# Altium PCB DC_Input.PcbDoc
Units mm, origin at the board's own origin, x right, y up, seen from the top; angles counter-clockwise.
Board outline 181.99 x 100.46 mm, 2 copper layers (Top Layer, Bottom Layer); 86 components, 56 nets, 287 pads, 8 vias.
Unrouted connection lines stored in the file: 6.
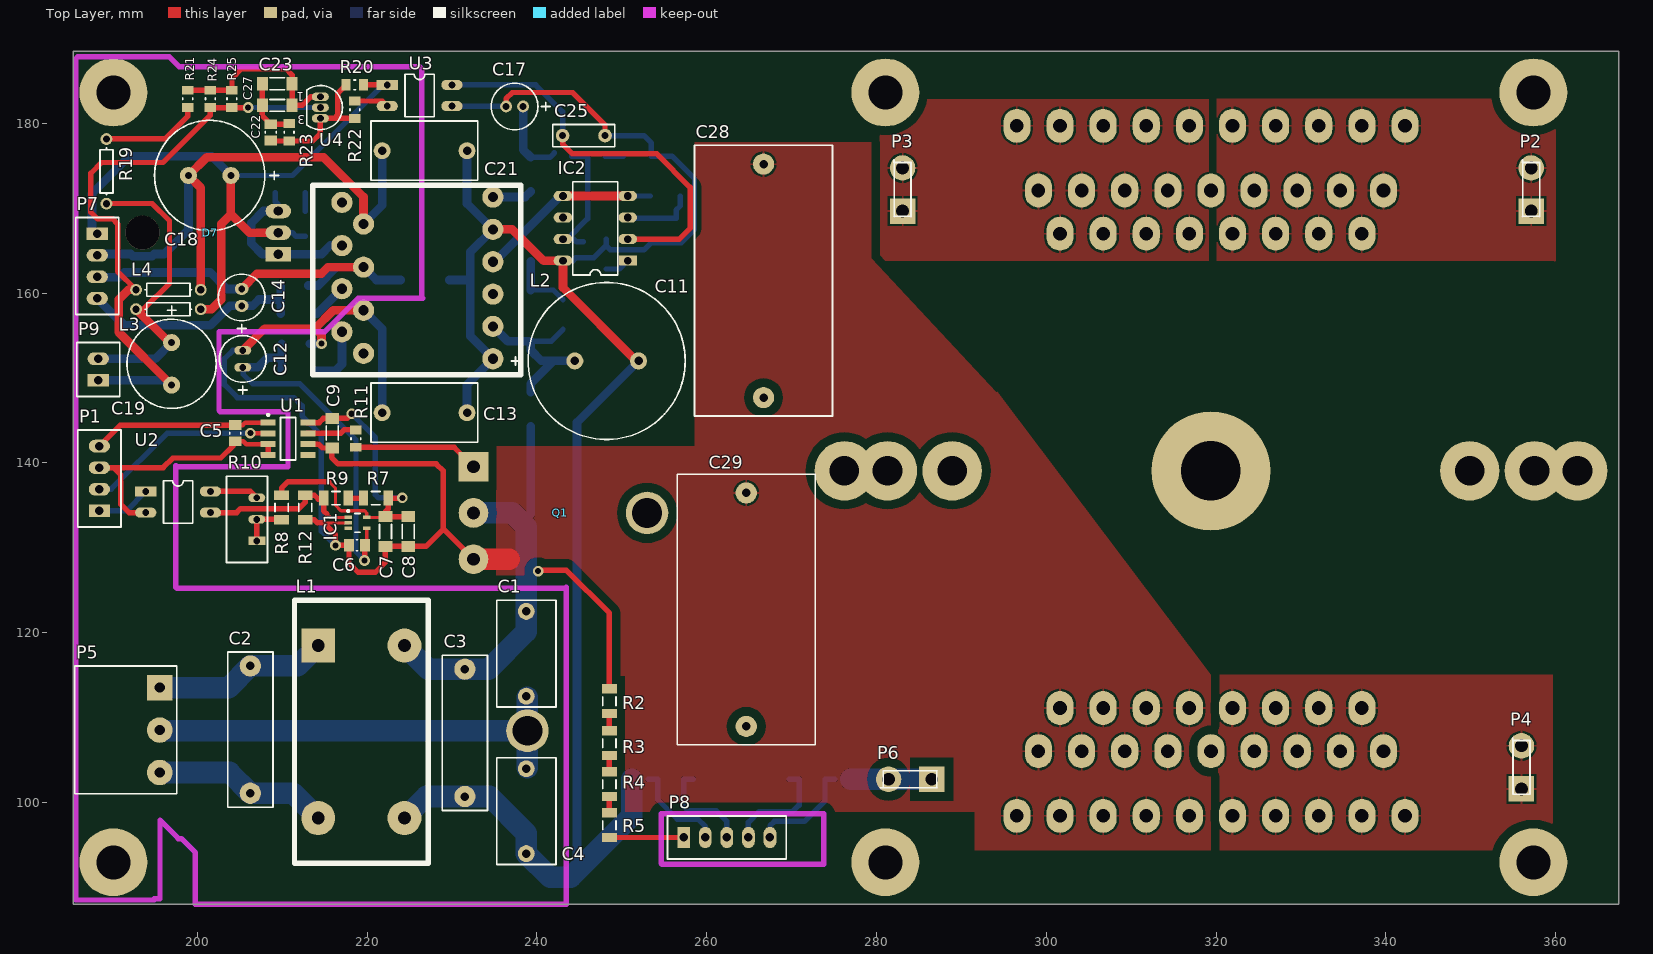
[diagram p0: Top Layer view]
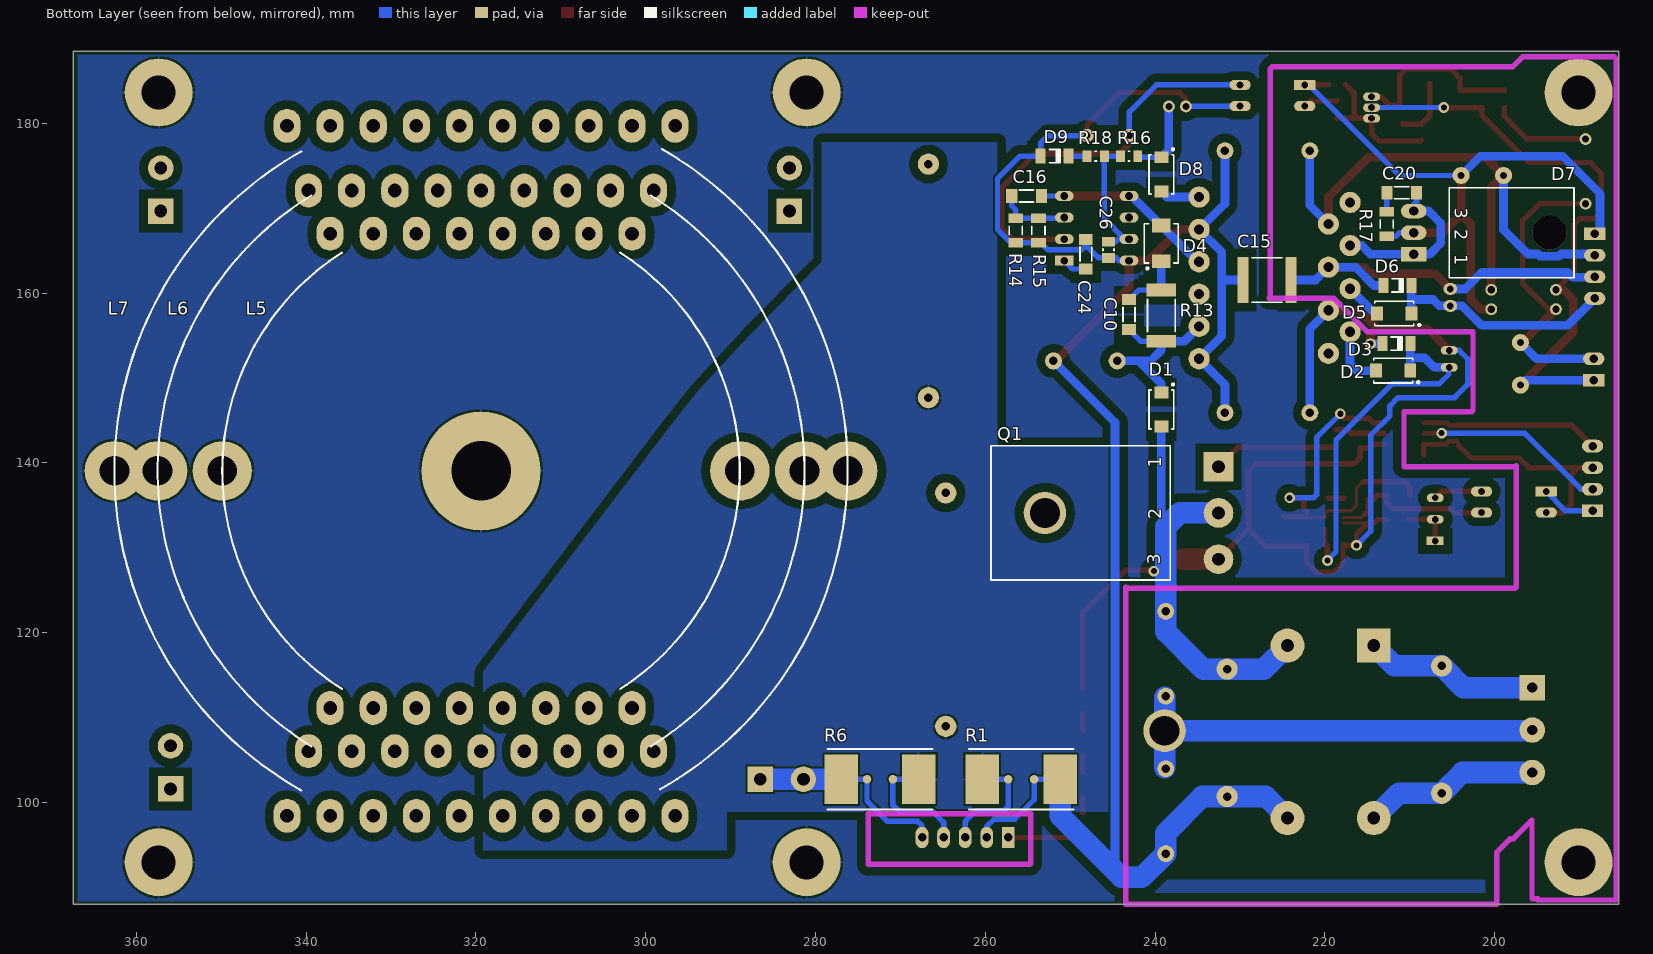
[diagram p1: Bottom Layer view, seen from below]

## Layer stack, top to bottom
Top Solder: solder mask 0.0102, Solder Resist, Dk 3.5
Top Layer: signal copper 0.0356
Dielectric1: dielectric 0.32, FR-4, Dk 4.8
Bottom Layer: signal copper 0.0356
Bottom Solder: solder mask 0.0102, Solder Resist, Dk 3.5

## Board outline
185.42,188.468 367.411,188.468 367.411,88.011 185.42,88.011

## Design rules (kind name [scope] priority, off if disabled: settings)
Clearance Clearance_3 [(InNet('NetL5_1') OR InNet('NetL5_9') OR InNet('NetL5_13') OR InNet('EARTH'))] p1: gap=1.016 ignorepadtopadclearanceinfootprint=FALSE except(0: Arc-Hole Track-Hole SMDPad-Hole THPad-Hole Via-Hole Fill-Hole Poly-Hole Region-Hole Text-Hole)
Clearance Clearance_2 [InNet('-15V_ISO1')] p2: gap=1.016 ignorepadtopadclearanceinfootprint=FALSE except(0: Arc-Hole Track-Hole SMDPad-Hole THPad-Hole Via-Hole Fill-Hole Poly-Hole Region-Hole Text-Hole)
Clearance Clearance_1 [InNet('-15V_ISO1')] p3: gap=1.016 ignorepadtopadclearanceinfootprint=FALSE except(0: Arc-Hole Track-Hole SMDPad-Hole THPad-Hole Via-Hole Fill-Hole Poly-Hole Region-Hole Text-Hole)
Clearance [All] p4: gap=0.254 ignorepadtopadclearanceinfootprint=FALSE except(0: Arc-Hole Track-Hole SMDPad-Hole THPad-Hole Via-Hole Fill-Hole Poly-Hole Region-Hole Text-Hole)
PolygonConnect [All] p1: connectstyle=Relief reliefconductorwidth=0.254 reliefentries=4 polygonreliefangle="90 Angle" airgapwidth=0.254
RoomDefinition DC_Current_Voltage_Measurement [InComponentClass('DC_Current_Voltage_Measurement')] p1: confinementstyle=ConfineIn formatcopy=TRUE lockcomponents=FALSE outline 246.761,94.795 250.391,94.795 250.391,114.734 246.761,114.734
RoutingVias [All] p1: holewidth=0.711 width=1.27 viastyle="Through Hole" minholewidth=0.711 minwidth=1.27 maxholewidth=0.711 maxwidth=1.27
SolderMaskExpansion [All] p1: expansion=0.102 istentingtop=FALSE
Width [All] p1: maxlimit=2.54 minlimit=0.254 preferedwidth=0.508 minimp=50.000000 maximp=50.000000 favimp=50.000000
30 further rules are at their usual default settings.

## Classes and differential pairs
component class "Flyback Converter": C10 C11 C12 C13 C14 C15 C16 C17 C18 C19 C20 C21 C22 C23 C24 C25 C26 C27 D1 D2 D3 D4 D5 D6 D7 D8 D9 IC2 L2 L3 L4 P7 P9 R13 R14 R15 R16 R17 R18 R19 R20 R21 R22 R23 R24 R25 U3 U4
component class Inductors: L5 L6 L7
component class Main: C1 C2 C3 C4 C5 C6 C7 C8 C9 C28 C29 IC1 L1 P1 P2 P3 P4 P5 P6 P8 Q1 R1 R2 R3 R4 R5 R6 R7 R8 R9 R10 R11 R12 U1 U2

## Components (designator, comment, footprint, x,y, rotation, side; value= is the part's Value field where it differs from the comment)
C1 "TDK CD12-E2GA222MYNS" "SAFETY Y1 type" 238.76,112.522 r90 top value=2.2nF
C2 "EPCOS B32922C3104" "MKP PITCH:15mm SIZE:5mmx18mm" 206.248,101.092 r90 top value=100nF
C3 "EPCOS B32922C3104" "MKP PITCH:15mm SIZE:5mmx18mm" 231.521,100.711 r90 top value=100nF
C4 "TDK CD12-E2GA222MYNS" "SAFETY Y1 type" 238.76,93.98 r90 top value=2.2nF
C5 "EPCOS C2012X7R1H104K" Chip2PinSM127P600-8N#1 204.47,143.51 r90 top value=100nF
C6 "EPCOS C2012X7R1H104K" Chip2PinSM127P600-8N#1 218.821,130.302 r0 top value=100nF
C7 "ETHER C3216X7R1H105K" "CAPC3216X18N 1206" 222.177,131.925 r90 top value=1uF
C8 "ETHER C3216X7R1H105K" "CAPC3216X18N 1206" 224.844,131.925 r90 top value=1uF
C9 "ETHER C3216X7R1H105K" "CAPC3216X18N 1206" 215.9,143.51 r90 top value=1uF
C10 "TDK C3216C0G2J222J115AA" "CAPC3216X18N 1206" 243.078,157.48 r270 bottom value=2.2nF
C11 "RUBYCON 400BXC68MEFC18X25" "Radial, pitch: 7.5mm diam:18mm" 244.475,152.019 r0 top value=68uF
C12 "EPCOS B41827A6226M000" "Radial, Pitch: 2mm Diam: 5mm"#1 205.359,151.257 r90 top value=22uF
C13 "TDK CD12-E2GA222MYNS" "SAFETY Y1 type" 231.775,145.923 r180 top value=2.2nF
C14 "EPCOS B41827A6226M000" "Radial, Pitch: 2mm Diam: 5mm"#2 205.232,158.496 r90 top value=22uF
C15 "MURATA GA355QR7GF222KW01L" Chip2PinSM127P600-8N_safety 226.822,161.544 r0 bottom value=2.2nF
C16 "EPCOS B37871K5221J60" "CAPC3216X18N 1206" 255.143,171.45 r180 bottom value=DNP
C17 "EPCOS B41827A6226M000" "Radial, Pitch: 2mm Diam: 5mm"#3 238.379,181.991 r180 top value=22uF
C18 "EPCOS B41856A5108M000" "Rad 12.5mm  pitch: 5mm" 203.962,173.863 r180 top value=1000uF
C19 "EPCOS B41856A5337M008" "Rad 10mm  pitch: 5mm" 196.977,154.178 r270 top value=330uF
C20 "EPCOS B37872K5223K60" "CAPC3216X18N 1206" 210.947,171.831 r0 bottom value=22nF
C21 "TDK CD12-E2GA222MYNS" "SAFETY Y1 type" 231.775,176.784 r180 top value=2.2nF
C22 "EPCOS B37940K51102J60" Chip2PinSM127P600-8N#1 208.661,178.943 r90 top value=1nF
C23 "EPCOS B37872K5223K60" "CAPC3216X18N 1206" 209.423,184.658 r0 top value=22nF
C24 "EPCOS CL31B473KBCNNNC" "CAPC3216X18N 1206" 248.158,164.592 r270 bottom value=47nF
C25 "EPCOS B32529C0102K000" "MKT Pitch: 5mm 2.5 × 7.3 mm" 248.031,178.562 r180 top value=1nF
C26 "EPCOS C2012X7R1H104K" Chip2PinSM127P600-8N#1 245.491,165.1 r90 bottom value=100nF
C27 "EPCOS CL31B473KBCNNNC" "CAPC3216X18N 1206" 209.423,182.118 r0 top value=47nF
C28 "EPCOS B32794D2106" "MKP AC filtering - 10" 266.7,147.701 r90 top value=10uF
C29 "EPCOS B32794D2106" "MKP AC filtering - 10" 264.668,108.966 r90 top value=10uF
D1 "M7" "DIOM4326X26N - SMA" 239.268,146.304 r270 bottom
D2 "ES1D" "DIOM4326X26N - SMA" 211.963,150.876 r0 bottom
D3 "BZV55C15V" DIOMELF3515N 211.582,154.051 r180 bottom
D4 "STTH112" "DIOM4336X26N - SMB" 239.268,165.862 r90 bottom
D5 "ES1D" "DIOM4326X26N - SMA" 211.836,157.607 r0 bottom
D6 "BZV55C15V" DIOMELF3515N 211.455,160.909 r180 bottom
D7 "V30100C" "TO-220 Horiz. Heatsink" 209.55,167.132 r90 top
D8 "ES1D" "DIOM4326X26N - SMA" 239.268,173.99 r270 bottom
D9 "BZV55C22V" DIOMELF3515N 251.841,176.149 r180 bottom
IC1 "TPS71501" TSOP65P210X110-5N 218.875,132.941 r0 top
IC2 "ICE3BR1765J" PDIP8 246.888,167.64 r90 top
L1 "Coupled Inductors" "Bourns 8108-RC" 224.409,118.491 r270 top value=1mH
L2 "2 Primary, 3 Secondary, Shield" CORE_E_20/10/6_14pin 219.583,152.908 r180 top
L3 "Inductor" AXIAL-0.3 196.596,158.115 r180 top value=10nH
L4 "Inductor" AXIAL-0.3 196.596,160.401 r180 top value=10nH
L5 "Coupled Inductors" Core_PM_62/49 319.405,139.072 r90 bottom value=10mH
L6 "Coupled Inductors" Core_PM_74/59 339.725,106.052 r90 bottom value=10mH
L7 "Coupled Inductors" Core_PM_87/70 319.405,139.072 r90 bottom value=10mH
P1 "WF-4" HDR1X4 188.468,134.366 r90 top
P2 "Faston 5mm PCB" "FASTON 5mm PCB" 357.124,172.212 r90 top
P3 "Faston 5mm PCB" "FASTON 5mm PCB" 283.083,172.212 r90 top
P4 "Faston 5mm PCB" "FASTON 5mm PCB" 355.981,104.14 r90 top
P5 "XY2500R-A-3P" XY2500R-A-3P 195.58,113.538 r270 top
P6 "Faston 5mm PCB" "FASTON 5mm PCB" 283.972,102.743 r180 top
P7 "WF-4" HDR1X4 188.214,167.005 r270 top
P8 "WF-5" HDR1X5 257.302,95.885 r0 top
P9 "WF-2" HDR1X2 188.341,149.733 r90 top
Q1 "IPx65R110CFD" "TO-247 Horiz. Heatsink" 232.537,134.112 r270 top
R1 "Shunt Resistor Kelvin" Chip2PinSM127P600-8N#2 255.778,102.743 r180 bottom value=20m
R2 "Resistor SMD 1206" "RESC3116X07N - 1206" 248.539,111.94 r90 top value=1M
R3 "Resistor SMD 1206" "RESC3116X07N - 1206" 248.539,106.987 r90 top value=1M
R4 "Resistor SMD 1206" "RESC3116X07N - 1206" 248.539,102.161 r90 top value=1M
R5 "Resistor SMD 1206" "RESC3116X07N - 1206" 248.539,97.335 r90 top value=1M
R6 "Shunt Resistor Kelvin" Chip2PinSM127P600-8N#2 272.415,102.743 r180 bottom value=20m
R7 "Resistor SMD 1206" "RESC3116X07N - 1206" 221.034,135.862 r0 top value=100K
R8 "Resistor SMD 1206" "RESC3116X07N - 1206" 209.931,134.747 r90 top value=100K
R9 "Resistor SMD 1206" "RESC3116X07N - 1206" 216.335,135.862 r0 top value=1M
R10 "Bourns 3386" "Variable Resistor Horizontal" 207.01,133.35 r90 top value=1M
R11 "Resistor SMD 0805" "Chip2PinSM127P600-8N - 0805" 218.694,142.875 r270 top value=165R
R12 "Resistor SMD 1206" "RESC3116X07N - 1206" 212.725,134.747 r90 top value=100K
R13 "Resistor SMD 2512" "Chip2PinSM127P600-8N 2512" 239.268,157.353 r270 bottom value=1K
R14 "Resistor SMD 1206" "RESC3116X07N - 1206" 256.413,167.386 r90 bottom value="1R3 1%"
R15 "Resistor SMD 1206" "RESC3116X07N - 1206" 253.746,167.386 r90 bottom value="1R3 1%"
R16 "Resistor SMD 0805" "Chip2PinSM127P600-8N - 0805" 243.078,176.149 r180 bottom value=18R
R17 "Resistor SMD 1206" "RESC3116X07N - 1206" 212.725,168.148 r270 bottom value=1K
R18 "Resistor SMD 0805" "Chip2PinSM127P600-8N - 0805" 247.015,176.149 r180 bottom value=47R
R19 "Resistor Through-hole" AXIAL-0.3 189.306,174.346 r270 top value=75K
R20 "Resistor SMD 0805" "Chip2PinSM127P600-8N - 0805" 218.567,184.531 r0 top value=1.2K
R21 "Resistor SMD 0805" "Chip2PinSM127P600-8N - 0805" 198.882,182.88 r270 top value=1K
R22 "Resistor SMD 0805" "Chip2PinSM127P600-8N - 0805" 218.567,181.61 r90 top value=430R
R23 "Resistor SMD 0805" "Chip2PinSM127P600-8N - 0805" 210.82,178.943 r270 top value=1K
R24 "Resistor SMD 0805" "Chip2PinSM127P600-8N - 0805" 201.549,182.88 r90 top value=DNP
R25 "Resistor SMD 0805" "Chip2PinSM127P600-8N - 0805" 204.089,182.88 r90 top value=20K
U1 "IRS2101" SOIC127P600X175-8N 210.693,142.847 r0 top
U2 "SFH617A" DIP4 193.929,136.652 r0 top
U3 "SFH617A" DIP4 222.377,184.531 r0 top
U4 "TL431ACLP" LP03 214.503,181.864 r180 top

## Footprints (in the part's own frame and the unit in brackets; to place one, negate y for a bottom-side part, rotate by r counter-clockwise, add the part's x,y. Pads: shape width x height; smd on the part's side, far side on the other; paste and mask are expansions set on the pad)
AXIAL-0.3 [mm] "Axial Device, Thru-Hole; 2 Leads; 0.3 in Pin Spacing"
  round 1.4 hole 0.85: 1(-3.81,0) 2(3.81,0)
  silkscreen extent -2.77,-0.76 2.77,0.76
"Bourns 8108-RC" [mm] "Common mode inductor 10A 1mH"
  rect 4x4 hole 1.5: 1(0,-10.16)
  round 4 hole 1.5: 2(0,0) 3(20.32,0) 4(20.32,-10.16)
  silkscreen extent -5.33,-12.95 25.65,2.79
"CAPC3216X18N 1206" [mm] "Chip Capacitor, 2-Leads, Body 3,20x1,60mm, IPC Medium Density"
  rect 1.3x1.6 smd: 1(-1.75,0) 2(1.75,0)
  silkscreen extent -0.85,-0.7 0.85,0.7, body extent -1.7,-0.9 1.7,0.9, height 1.8
Chip2PinSM127P600-8N#1 [mm] "SMD 0805"
  rect 1.15x1.5 smd: 1(-0.95,0) 2(0.95,0)
  silkscreen extent -0.1,-0.65 0.1,0.65, body extent -1.1,-0.72 1.1,0.72, height 0.95
Chip2PinSM127P600-8N#2 [mm] "WSR5 5W - Low inductance SMD Resistor - Kelvin terminals added"
  rect 3.94x5.84 smd: 1(-4.575,0) 4(4.575,0)
  round 1 smd: 2(-1.524,0) 3(1.524,0)
  Top Layer lines w0.635: 2.667,0 1.524,0 ; -1.524,0 -2.667,0
  silkscreen extent -6.19,-3.55 6.19,3.55, body extent -6.18,-2.8 6.18,2.79, height 2.54
"Chip2PinSM127P600-8N 2512" [mm] "SMD Resistor 1W 2512"
  rect 1.5x3.45 smd: 1(-3.025,0) 2(3.025,0)
  silkscreen extent -1.9,-1.63 1.9,1.63, body extent -3.4,-1.7 3.4,1.7, height 0.7
"Chip2PinSM127P600-8N - 0805" [mm] "SMD 0805"
  rect 1.05x1.35 smd: 1(-1.025,0) 2(1.025,0)
  silkscreen extent -0.1,-0.58 0.1,0.58, body extent -1.08,-0.7 1.08,0.7, height 0.64
Chip2PinSM127P600-8N_safety [mm] "Safety capacitor 2220 (5750 Metric)"
  rect 1.3x5.45 smd: 1(-2.85,0) 2(2.85,0)
  silkscreen extent -1.8,-2.62 1.8,2.63, body extent -3.05,-2.7 3.05,2.7, height 1.5
CORE_E_20/10/6_14pin [mm] "Coil former CORE_E_20/10/6_14pin"
  round 2.5 hole 1.2: 1(-15.24,0.635) 2(-15.24,-3.175) 3(-15.24,-6.985) 4(-15.24,-10.795) 5(-15.24,-14.605) 6(-15.24,-18.415) 7(0,0) 8(2.54,-2.54) 9(0,-5.08) 10(2.54,-7.62) 11(0,-10.16) 12(2.54,-12.7) 13(0,-15.24) 14(2.54,-17.78)
  silkscreen extent -18.54,-19.81 5.97,2.54
Core_PM_62/49 [mm] "PM core 62/49"
  round 9 hole 4.5: 0(0,0)
  oval 4x3.2 hole 1.6: 1(-27.94,17.78) 2(-27.94,12.7) 3(-27.94,7.62) 4(-27.94,2.54) 5(-27.94,-2.54) 6(-27.94,-7.62) 7(-27.94,-12.7) 8(-27.94,-17.78) 9(27.94,-17.78) 10(27.94,-12.7) 11(27.94,-7.62) 12(27.94,-2.54) 13(27.94,2.54) 14(27.94,7.62) 15(27.94,12.7) 16(27.94,17.78)
  round 7 hole 3.5: 17(0,-30.48) 18(0,30.48)
  silkscreen extent -25.71,-30.48 25.71,30.48
Core_PM_74/59 [mm] "PM core 74/59"
  round 9 hole 4.5: 0(33.02,-20.32)
  oval 4x3.2 hole 1.6: 1(0,0) 2(0,-5.08) 3(0,-10.16) 4(0,-15.24) 5(0,-20.32) 6(0,-25.4) 7(0,-30.48) 8(0,-35.56) 9(0,-40.64) 10(66.04,-40.64) 11(66.04,-35.56) 12(66.04,-30.48) 13(66.04,-25.4) 14(66.04,-20.32) 15(66.04,-15.24) 16(66.04,-10.16) 17(66.04,-5.08) 18(66.04,0)
  round 7 hole 3.5: 19(33.02,17.78) 20(33.02,-58.42)
  silkscreen extent 0.57,-58.42 65.47,17.78
Core_PM_87/70 [mm] "PM core 87/70"
  round 14 hole 7: 0(0,0)
  oval 4x3.2 hole 1.6: 1(-40.64,22.86) 2(-40.64,17.78) 3(-40.64,12.7) 4(-40.64,7.62) 5(-40.64,2.54) 6(-40.64,-2.54) 7(-40.64,-7.62) 8(-40.64,-12.7) 9(-40.64,-17.78) 10(-40.64,-22.86) 11(40.64,-22.86) 12(40.64,-17.78) 13(40.64,-12.7) 14(40.64,-7.62) 15(40.64,-2.54) 16(40.64,2.54) 17(40.64,7.62) 18(40.64,12.7) 19(40.64,17.78) 20(40.64,22.86)
  round 7 hole 3.5: 21(0,-43.18) 22(0,43.18)
  silkscreen extent -37.63,-43.18 37.89,43.18
"DIOM4326X26N - SMA" [mm] "Molded Diode, 2-Leads, Body 4,27x2,57mm, IPC Medium Density"
  rect 1.4x1.64 smd: 1(-2.015,0) 2(2.015,0)
  silkscreen extent -3.07,-1.45 2.3,1.49, body extent -2.3,-1.45 2.3,1.45, height 2.65
"DIOM4336X26N - SMB" [mm] "Molded Diode, 2-Leads, Body 4,32x3,63mm, IPC Medium Density"
  rect 1.62x2.18 smd: 1(-2.11,0) 2(2.11,0)
  silkscreen extent -3.07,-2 2.3,2, body extent -2.3,-1.97 2.3,1.97, height 2.65
DIOMELF3515N [mm] "MELF Diode, 2-Leads, Body 3,50x1,50mm, IPC Medium Density"
  rect 1.2x1.75 smd: 1(-1.65,0) 2(1.65,0)
  silkscreen extent -0.65,-0.77 0.65,0.78, body extent -1.85,-0.8 1.85,0.8, height 1.59
DIP4 [mm]
  rect 2.5x1.2 hole 0.8: 1(0,0)
  oval 2.5x1.2 hole 0.8: 2(0,-2.5) 3(7.62,-2.5) 4(7.62,0)
  silkscreen extent 2.08,-3.75 5.54,1.25
"FASTON 5mm PCB" [mm] "FASTON 5mm PCB"
  rect 3x3 hole 1.5: 1(-2.54,0)
  round 3 hole 1.5: 1(2.54,0)
  silkscreen extent -3.17,-1.02 3.5,1.02
HDR1X2 [mm] "Connector; Header; 2 Position; Pitch 2.54mm"
  rect 1.5x2.5 hole 1: 1(0,0)
  oval 1.5x2.5 hole 1: 2(2.54,0)
  silkscreen extent -1.91,-2.54 4.44,2.54
HDR1X4 [mm] "Connector; Header; 4 Position; Pitch 2.54mm"
  rect 1.5x2.5 hole 1: 1(0,0)
  oval 1.5x2.5 hole 1: 2(2.54,0) 3(5.08,0) 4(7.62,0)
  silkscreen extent -1.91,-2.54 9.53,2.54
HDR1X5 [mm] "Connector; Header; 5 Position; Pitch 2.54mm"
  rect 1.5x2.5 hole 1: 1(0,0)
  oval 1.5x2.5 hole 1: 2(2.54,0) 3(5.08,0) 4(7.62,0) 5(10.16,0)
  silkscreen extent -1.91,-2.54 12.06,2.54
LP03 [mm] "TO, Flat Index; 3 In-Line, Axial Leads; Body Dia. 4.8mm; Leads 0.56 x 0.41 mm (max)"
  oval 2x1 hole 0.8: 1(0,-1.27) 2(0,0) 3(0,1.27)
  silkscreen extent -2.6,-2.6 1.6,2.6
"MKP AC filtering - 10" [mm] "Pitch: 27.5 mm w: 16mm h:32mm l:31.5mm"
  round 2.5 hole 1: 1(0,0) 2(27.5,0)
  silkscreen extent -2.16,-8.13 29.72,8.13
"MKP PITCH:15mm SIZE:5mmx18mm" [mm] "Pitch: 15 mm w: 5mm h:10.5mm l:18mm"
  round 2.5 hole 1: 1(0,0) 2(15,0)
  silkscreen extent -1.65,-2.67 16.64,2.67
"MKT Pitch: 5mm 2.5 × 7.3 mm" [mm]
  round 1.6 hole 0.8: 1(0,0) 2(5,0)
  silkscreen extent -1.15,-1.3 6.15,1.3
PDIP8 [mm] "DIP; 8 Leads; Row Spacing 7.62 mm; Pitch 2.54 mm"
  rect 1.2x2.2 hole 0.9: 1(-3.81,-3.81)
  oval 1.2x2.2 hole 0.9: 2(-1.27,-3.81) 3(1.27,-3.81) 4(3.81,-3.81) 5(3.81,3.81) 6(1.27,3.81) 7(-1.27,3.81) 8(-3.81,3.81)
  silkscreen extent -5.5,-2.65 5.5,2.65
"Rad 10mm  pitch: 5mm" [mm]
  round 2 hole 0.8: 1(0,0) 2(5,0)
  silkscreen extent -4.32,-5.25 7.75,5.25
"Rad 12.5mm  pitch: 5mm" [mm]
  round 2 hole 0.8: 1(0,0) 2(5,0)
  silkscreen extent -5.61,-6.5 9,6.5
"Radial, Pitch: 2mm Diam: 5mm"#1 [mm]
  oval 1x2 hole 0.8: 1(0,0) 2(2,0)
  silkscreen extent -3.17,-2.75 3.75,2.75
"Radial, Pitch: 2mm Diam: 5mm"#2 [mm]
  oval 1.4x1.6 hole 0.8: 1(0,0) 2(2,0)
  silkscreen extent -3.17,-2.75 3.75,2.75
"Radial, Pitch: 2mm Diam: 5mm"#3 [mm]
  round 1.4 hole 0.8: 1(0,0) 2(2,0)
  silkscreen extent -3.17,-2.75 3.75,2.75
"Radial, pitch: 7.5mm diam:18mm" [mm]
  round 2 hole 1: 1(0,0) 2(7.5,0)
  silkscreen extent -7.49,-9.25 13,9.25
"RESC3116X07N - 1206" [mm] "Chip Resistor, 2-Leads, Body 3,05x1,60mm, IPC Medium Density"
  rect 1.1x1.75 smd: 1(-1.45,0) 2(1.45,0)
  silkscreen extent -0.5,-0.77 0.5,0.77, body extent -1.55,-0.85 1.55,0.85, height 0.65
"SAFETY Y1 type" [mm] "Pitch 10mm 7 x 12mm"
  round 2 hole 1: 1(0,0) 2(10,0)
  silkscreen extent -1.27,-3.5 11.3,3.5
SOIC127P600X175-8N [mm] "SOIC, 8-Leads, Body 4,90x3,90mm, Pitch 1,27mm, IPC Medium Density"
  rect 1.78x0.72 smd: 1(-2.34,1.905) 2(-2.34,0.635) 3(-2.34,-0.635) 4(-2.34,-1.905) 5(2.34,-1.905) 6(2.34,-0.635) 7(2.34,0.635) 8(2.34,1.905)
  silkscreen extent -2.46,-2.5 0.9,2.94, body extent -2,-2.5 2,2.5, height 1.75
"TO-220 Horiz. Heatsink" [mm] "TO, Thru-Hole, Horizontal, Heatsink Mounted; 3 In-Line Leads; Pitch 5.45 mm"
  round 4 hole 4: 0(0,16)
  rect 1.7x3 hole 1.1: 1(-2.54,0)
  oval 1.7x3 hole 1.1: 2(0,0) 3(2.54,0)
"TO-247 Horiz. Heatsink" [mm] "TO, Thru-Hole, Horizontal, Heatsink Mounted; 3 In-Line Leads; Pitch 5.45 mm"
  round 5 hole 3.5: 0(0,20.447)
  rect 3.5x3.5 hole 1.5: 1(-5.45,0)
  round 3.5 hole 1.5: 2(0,0) 3(5.45,0)
TSOP65P210X110-5N [mm] "TSOP, 5-Leads, Body 2,00x1,25mm, Pitch 0,65mm, IPC Medium Density"
  rect 0.9x0.4 smd: 1(-1.1,0.65) 2(-1.1,0) 3(-1.1,-0.65) 4(1.1,-0.65) 5(1.1,0.65)
  silkscreen extent -1.22,-1.1 0.3,1.52, body extent -0.7,-1.1 0.7,1.1, height 1.1
"Variable Resistor Horizontal" [mm] "Thru-Hole; 3 Leads"
  rect 1x2 hole 0.8: 1(-2.54,0)
  oval 1x2 hole 0.8: 2(0,0) 3(2.54,0)
  silkscreen extent -5.08,-1.27 5.08,3.56
XY2500R-A-3P [mm] "HEADER 3P 90gra P/CI P=5MM"
  rect 3x3 hole 1.2: 1(0,0)
  round 3 hole 1.2: 2(5,0) 3(10,0)
  silkscreen extent -2.54,-10 12.5,2

## Part data
C1 C4 C13 C21: "Safety Standard Certified Ceramic Y1 2.2nF 250Vac", LatestRevisionDate=17-Jul-2002, LatestRevisionNote="Re-released for DXP Platform.", PackageDescription="Radial Cap, Thru-Hole; 2 Leads; 0.3 in Pin Spacing", PackageReference=RAD-0.3, Published=8-Jun-2000, Publisher="Altium Limited"
C2 C3: "MKP EMI suppression X2 100nF 305Vac", LatestRevisionDate=17-Jul-2002, LatestRevisionNote="Re-released for DXP Platform.", PackageDescription="Radial Cap, Thru-Hole; 2 Leads; 0.3 in Pin Spacing", PackageReference=RAD-0.3, Published=8-Jun-2000, Publisher="Altium Limited"
C5 C6 C26: "Ceramic Multilayer 100nF 50Vdc X7R", LatestRevisionDate=17-Jul-2002, LatestRevisionNote="Re-released for DXP Platform.", PackageDescription="Radial Cap, Thru-Hole; 2 Leads; 0.3 in Pin Spacing", PackageReference=RAD-0.3, Published=8-Jun-2000, Publisher="Altium Limited"
C7 C8 C9: "Ceramic Multilayer 1uF 50Vdc X7R", LatestRevisionDate=17-Jul-2002, LatestRevisionNote="Re-released for DXP Platform.", PackageDescription="Radial Cap, Thru-Hole; 2 Leads; 0.3 in Pin Spacing", PackageReference=RAD-0.3, Published=8-Jun-2000, Publisher="Altium Limited"
C10: "Ceramic Multilayer 2.2nF 630Vdc COG", LatestRevisionDate=17-Jul-2002, LatestRevisionNote="Re-released for DXP Platform.", PackageDescription="Radial Cap, Thru-Hole; 2 Leads; 0.3 in Pin Spacing", PackageReference=RAD-0.3, Published=8-Jun-2000, Publisher="Altium Limited"
C11: "MINIATURE ALUMINUM ELECTROLYTIC 68uF 400V 105ºC", LatestRevisionDate=17-Jul-2002, LatestRevisionNote="Re-released for DXP Platform.", PackageDescription="Polarized Capacitor (Radial); 2 Leads", PackageReference=RB7.6-15, Published=8-Jun-2000, Publisher="Altium Limited"
C12 C14 C17: "ALUMINUM ELECTROLYTIC 22UFX50V", LatestRevisionDate=17-Jul-2002, LatestRevisionNote="Re-released for DXP Platform.", PackageDescription="Polarized Capacitor (Radial); 2 Leads", PackageReference=RB7.6-15, Published=8-Jun-2000, Publisher="Altium Limited"
C15: "Safety Standard Certified Ceramic Y2 2.2nF 250Vac", LatestRevisionDate=17-Jul-2002, LatestRevisionNote="Re-released for DXP Platform.", PackageDescription="Radial Cap, Thru-Hole; 2 Leads; 0.3 in Pin Spacing", PackageReference=RAD-0.3, Published=8-Jun-2000, Publisher="Altium Limited"
C16: "Ceramic Multilayer  50Vdc C0G", LatestRevisionDate=17-Jul-2002, LatestRevisionNote="Re-released for DXP Platform.", PackageDescription="Radial Cap, Thru-Hole; 2 Leads; 0.3 in Pin Spacing", PackageReference=RAD-0.3, Published=8-Jun-2000, Publisher="Altium Limited"
C18: "ALuminum Electrolytic Low Impedance 105 °C 1000uF x 25V", LatestRevisionDate=17-Jul-2002, LatestRevisionNote="Re-released for DXP Platform.", PackageDescription="Polarized Capacitor (Radial); 2 Leads", PackageReference=RB7.6-15, Published=8-Jun-2000, Publisher="Altium Limited"
C19: "ALuminum Electrolytic Low Impedance 105 °C 330uF x 25V", LatestRevisionDate=17-Jul-2002, LatestRevisionNote="Re-released for DXP Platform.", PackageDescription="Polarized Capacitor (Radial); 2 Leads", PackageReference=RB7.6-15, Published=8-Jun-2000, Publisher="Altium Limited"
C20 C23: "Ceramic Multilayer 22nF 50Vdc X7R", LatestRevisionDate=17-Jul-2002, LatestRevisionNote="Re-released for DXP Platform.", PackageDescription="Radial Cap, Thru-Hole; 2 Leads; 0.3 in Pin Spacing", PackageReference=RAD-0.3, Published=8-Jun-2000, Publisher="Altium Limited"
C22: "Ceramic Multilayer 1nF 50Vdc COG", LatestRevisionDate=17-Jul-2002, LatestRevisionNote="Re-released for DXP Platform.", PackageDescription="Radial Cap, Thru-Hole; 2 Leads; 0.3 in Pin Spacing", PackageReference=RAD-0.3, Published=8-Jun-2000, Publisher="Altium Limited"
C24 C27: "Ceramic Multilayer 47nF 50Vdc X7R", LatestRevisionDate=17-Jul-2002, LatestRevisionNote="Re-released for DXP Platform.", PackageDescription="Radial Cap, Thru-Hole; 2 Leads; 0.3 in Pin Spacing", PackageReference=RAD-0.3, Published=8-Jun-2000, Publisher="Altium Limited"
C25: "MKT General purpose 1nF 63Vdc", LatestRevisionDate=17-Jul-2002, LatestRevisionNote="Re-released for DXP Platform.", PackageDescription="Radial Cap, Thru-Hole; 2 Leads; 0.3 in Pin Spacing", PackageReference=RAD-0.3, Published=8-Jun-2000, Publisher="Altium Limited"
C28 C29: "MKP AC Filtering 10uF 630Vdc", LatestRevisionDate=17-Jul-2002, LatestRevisionNote="Re-released for DXP Platform.", PackageDescription="Radial Cap, Thru-Hole; 2 Leads; 0.3 in Pin Spacing", PackageReference=RAD-0.3, Published=8-Jun-2000, Publisher="Altium Limited"
D1: library part "M7 SMA", "1A 1000V SMA", Code_JEDEC=DO-214-AB, LatestRevisionDate=17-Jul-2002, LatestRevisionNote="Re-released for DXP Platform.", PackageDescription="DO-214-AB/SMC; 2 C-Bend Leads; Body 7.9 x 5.9 mm, inc. leads (LxW)", PackageReference=SMC, PackageVersion=Sep-1996, Published=8-Jun-2000, Publisher="Altium Limited"
D2 D5 D8: "Ultrafast rectifier 1A 200V", Code_JEDEC=DO-214-AB, LatestRevisionDate=17-Jul-2002, LatestRevisionNote="Re-released for DXP Platform.", PackageDescription="DO-214-AB/SMC; 2 C-Bend Leads; Body 7.9 x 5.9 mm, inc. leads (LxW)", PackageReference=SMC, PackageVersion=Sep-1996, Published=8-Jun-2000, Publisher="Altium Limited"
D3 D6: "Zener Diode 15V 0.5W", LatestRevisionDate=17-Jul-2002, LatestRevisionNote="Re-released for DXP Platform.", PackageDescription="Diode, Thru-Hole; 2 Leads; 0.7 in Pin Spacing", PackageReference=DIODE-0.7, Published=8-Jun-2000, Publisher="Altium Limited"
D4: "High voltage ultrafast rectifier", Code_JEDEC=DO-214-AB, LatestRevisionDate=17-Jul-2002, LatestRevisionNote="Re-released for DXP Platform.", PackageDescription="DO-214-AB/SMC; 2 C-Bend Leads; Body 7.9 x 5.9 mm, inc. leads (LxW)", PackageReference=SMC, PackageVersion=Sep-1996, Published=8-Jun-2000, Publisher="Altium Limited"
D7: "Trench MOS Barrier Schottky Rectifier 2x 15A 100V"
D9: "Zener Diode 22V 0.5W", LatestRevisionDate=17-Jul-2002, LatestRevisionNote="Re-released for DXP Platform.", PackageDescription="Diode, Thru-Hole; 2 Leads; 0.7 in Pin Spacing", PackageReference=DIODE-0.7, Published=8-Jun-2000, Publisher="Altium Limited"
IC1: "LDO 50 mA, 24 V, 3.2-µA Supply Current"
IC2: "Off-Line SMPS Current Mode  Controller with integrated 650V  CoolMOS® and Startup cell  (frequency jitter Mode)"
L1: library part "Common mode filter 10A", "Bourns Common mode inductor 10A 1mH 8108-RC", Code_IEC=1005, Code_JEITA=0402, LatestRevisionDate=29-May-2009, LatestRevisionNote="IPC-7351 Footprint Added.", PackageDescription="Chip Inductor", PackageReference=0402-A, Published=8-Jun-2000, Publisher="Altium Limited"
L2: "Coupled Inductors with Ferrite Core", Value_P1=100uH, Code_IEC=1005, Code_JEITA=0402, LatestRevisionDate=29-May-2009, LatestRevisionNote="IPC-7351 Footprint Added.", PackageDescription="Chip Inductor", PackageReference=0402-A, Published=8-Jun-2000, Publisher="Altium Limited", Value_P2=100uH, Value_S1=100uH, Value_S2=100uH, Value_S3=100uH
L3 L4: library part "Ferrite Bead1", "Ferrite Bead Axial", Code_IEC=1005, Code_JEITA=0402, LatestRevisionDate=29-May-2009, LatestRevisionNote="IPC-7351 Footprint Added.", PackageDescription="Chip Inductor", PackageReference=0402-A, Published=8-Jun-2000, Publisher="Altium Limited"
L5: library part "Inductor 62/49", "Coupled Inductors with Ferrite core and Air gap", Code_IEC=1005, Code_JEITA=0402, LatestRevisionDate=29-May-2009, LatestRevisionNote="IPC-7351 Footprint Added.", PackageDescription="Chip Inductor", PackageReference=0402-A, Published=8-Jun-2000, Publisher="Altium Limited"
L6: library part "Inductor 74/59", "Coupled Inductors with Ferrite core and Air gap", Code_IEC=1005, Code_JEITA=0402, LatestRevisionDate=29-May-2009, LatestRevisionNote="IPC-7351 Footprint Added.", PackageDescription="Chip Inductor", PackageReference=0402-A, Published=8-Jun-2000, Publisher="Altium Limited"
L7: library part "Inductor 87/70", "Coupled Inductors with Ferrite core and Air gap", Code_IEC=1005, Code_JEITA=0402, LatestRevisionDate=29-May-2009, LatestRevisionNote="IPC-7351 Footprint Added.", PackageDescription="Chip Inductor", PackageReference=0402-A, Published=8-Jun-2000, Publisher="Altium Limited"
P1 P7: library part "Header 4", "Header, 4-Pin, 2.54mm pitch", LatestRevisionDate=17-Jul-2002, LatestRevisionNote="Re-released for DXP Platform.", Publisher="Altium Limited"
P5: "HEADER 3P 90gra P/CI P=5MM", LatestRevisionDate=17-Jul-2002, LatestRevisionNote="Re-released for DXP Platform.", Publisher="Altium Limited"
P8: library part "Header 5", "Header, 5-Pin, 2.54mm pitch", LatestRevisionDate=17-Jul-2002, LatestRevisionNote="Re-released for DXP Platform.", Publisher="Altium Limited"
P9: library part "Header 2", "Header, 2-Pin, 2.54mm pitch", LatestRevisionDate=17-Jul-2002, LatestRevisionNote="Re-released for DXP Platform.", Publisher="Altium Limited"
Q1: "Infineon Power MOSFET N-Channel 650V 31.2A", ComponentLink1Description="Manufacturer Link", ComponentLink1URL=http://www.irf.com/, ComponentLink2Description=Datasheet, ComponentLink2URL=http://www.irf.com/product-info/datasheets/data/IRHN7150.pdf, DatasheetVersion=13-Jul-2001, PackageDescription="SM; 3 Leadless Terminals; Body 10.28 x 7.64 x 3.06 mm (LxWxH)", PackageReference=SMD-0.5, PackageVersion=16-Sep-2002, Published=17-Sep-2003, Publisher="Altium Limited"
R10: library part "Bourns 3386 Horizontal 1-Turn", "Trimming Potentiometer Horizontal 1-Turn 10%", LatestRevisionDate=17-Jul-2002, LatestRevisionNote="Re-released for DXP Platform.", PackageDescription="Variable Resistor, Thru-Hole; 3 Leads", PackageReference=VR5, Published=8-Jun-2000, Publisher="Altium Limited", Set Position=0.5, Sim Note="Enter the Resistance value and the set point into parameter fields."
R13: "Resistor SMD 2512 1W", LatestRevisionDate=29-May-2009, LatestRevisionNote="IPC-7351 Footprint Added.", PackageDescription="Chip Resistor", PackageReference=J1-0603, Published=8-Jun-2000, Publisher="Altium Limited"
R19: library part Resistor, "Resistor 1/4W 5%", LatestRevisionDate=29-May-2009, LatestRevisionNote="IPC-7351 Footprint Added.", PackageDescription="Chip Resistor", PackageReference=J1-0603, Published=8-Jun-2000, Publisher="Altium Limited"
U1: "High and Low Side Driver IRF", Code_IPC=SOIC127P1030-16, Code_JEDEC=MS-013-AA, ComponentLink1Description="Manufacturer Link", ComponentLink1URL=http://www.irf.com/, ComponentLink2Description=Datasheet, ComponentLink2URL=http://www.irf.com/product-info/datasheets/data/ir2112.pdf, DatasheetVersion=PD60026J, LatestRevisionDate=13-Apr-2006, LatestRevisionNote="IPC-7351 Footprint Added.", Note="Pins 4, 5, 9, 10 and 16 are not connected", PackageDescription="16-Pin Small Outline Integrated Circuit 1.27 mm Pitch", PackageReference=SOIC16, Published=8-Jun-2000, Publisher="Altium Limited"
U2 U3: "Phototransistor Output, High Reliability,  5300 VRMS, 110 °C Rated", DatasheetVersion=Nov-2003, LatestRevisionDate=04-Mar-2005, LatestRevisionNote="Sch pins 3 & 4 Swapped.", PackageReference=DIP-4, Published=24-Mar-1999, Publisher="Altium Limited"
U4: "Adjustable Precision Shunt Regulator", Code_JEDEC=TO-226-AA, ComponentLink1Description="Manufacturer Link", ComponentLink1URL=http://www.ti.com/, ComponentLink2Description=Datasheet, ComponentLink2URL=http://www-s.ti.com/sc/ds/tl431a.pdf, DatasheetVersion=Oct-2000, LatestRevisionDate=06-Jun-2005, LatestRevisionNote="Sch pins 1 & 3 swapped", PackageDescription="TO, Flat Index; 3 In-Line, Axial Leads; Body Dia. 4.8mm; Leads 0.56 x 0.41 mm (max)", PackageReference=LP03, PackageVersion=Nov-2001, Published=15-Apr-2002, Publisher="Altium Limited"
P2 P3 P4 P6: LatestRevisionDate=17-Jul-2002, LatestRevisionNote="Re-released for DXP Platform.", Publisher="Altium Limited"
R1 R2 R3 R4 R5 R6 R7 R8 R9 R11 R12 R14 R15 R16 R17 R18 R20 R21 R22 R23 R24 R25: LatestRevisionDate=29-May-2009, LatestRevisionNote="IPC-7351 Footprint Added.", PackageDescription="Chip Resistor", PackageReference=J1-0603, Published=8-Jun-2000, Publisher="Altium Limited"

## Free pads (board coordinates)
  round 8 hole 4: 0(190.119,92.964) 0(190.119,183.642) 1(357.378,92.964) 2(357.378,183.642) 3(281.051,183.642) 4(281.051,92.964)
  round 5 hole 3.5: 0(238.887,108.458)

## Via types
v1: diameter 1.27, hole 0.711, Top Layer to Bottom Layer, 8 vias

## Nets (pads, with @x,y where several pads share a name; then routed paths per layer and width w, separated by ;. In a path a pad name is that pad's centre, name@x,y a point inside that pad or via, vN(x,y) a via of type N, cw(c..) or ccw(c..) an arc to the next point about the centre after c; other vN are vias at no path point)
15V_ISO3EXT_+: C19.1 L3.2 P9.2 R19.2 | length 35.6
  Top Layer w0.635: R19.2@189.763,170.561 194.691,170.561 196.723,168.529 196.723,161.163 193.675,158.115 L3.2
  Top Layer w1.016: L3.2 196.723,154.178 C19.1
  Bottom Layer w1.016: P9.2 195.072,152.273 C19.1
15V_ISO3EXT_-: C19.2 L4.2 P9.1 R24.1 R25.1 U4.2 | length 71.8
  Top Layer w0.635: L4.2 190.627,162.56 190.627,168.148 189.992,168.783 188.214,168.783 187.452,169.545 187.452,174.117 188.722,175.387 195.961,175.387 201.549,180.975 R24.1 R25.1 v1@205.985,181.855
  Top Layer w1.016: L4.2 191.897,160.401 190.754,159.258 190.754,155.401 C19.2
  Bottom Layer w0.635: v1(205.994,181.864) U4.2
  Bottom Layer w1.016: P9.1 196.422,149.733 C19.2
+15V: C5.2 P1.4 U1.1 | length 21
  Top Layer w0.508: C5.2 205.359,144.46 205.651,144.752 U1.1
  Top Layer w0.635: P1.4 190.942,144.46 C5.2
+15V_ISO1: C6.2 C12.1 D2.1 D3.2 IC1.4 | length 43.9
  Top Layer w0.381: C6.2@219.975,130.506 IC1.4
  Top Layer w0.635: v1(219.71,128.524) C6.2@219.71,130.241 ; C6.2 C6.2@219.975,130.506
  Bottom Layer w0.635: C12.1 205.359,151.144 205.415,151.088 205.415,150.439 206.502,149.352 212.061,149.352 218.694,142.719 218.694,129.54 v1(219.71,128.524)
  Bottom Layer w1.016: C12.1 207.137,151.257 208.28,152.4 209.948,152.4 ; D2.1 209.948,152.4 ; D3.2@209.948,154.035 209.948,152.4
+15V_ISO2: C14.1 D5.1 D6.2 P7.4 | length 27.5
  Bottom Layer w1.016: P7.4 191.389,156.21 201.549,156.21 203.835,158.496 C14.1 206.502,158.496 207.264,159.258 209.821,159.258 ; D5.1 209.821,159.258 ; D6.2@209.821,160.893 209.821,159.258
+15V_ISO3: C18.1 D7.2 L3.1 P7.1 R17.2 R20.2 U3.1 | length 77.7
  Top Layer w0.635: R20.2 U3.1
  Top Layer w1.016: L3.1 201.676,158.115 202.819,159.258 202.819,168.148 203.962,169.291 ; C18.1 203.962,169.291 ; D7.2 206.121,167.132 203.962,169.291
  Bottom Layer w0.635: C18.1 211.201,173.863 221.869,184.531 U3.1 ; D7.2 211.201,167.132 211.635,166.698 R17.2
  Bottom Layer w1.016: P7.1 187.846,167.005 187.604,167.247 187.604,171.729 192.024,176.149 201.676,176.149 C18.1
-15V_ISO1: C6.1 C7.1 C8.1 C9.1 C12.2 C13.2 C28.2 C29.2 D3.1 IC1.2 L2.9 L5.5 L5.6 L5.7 L5.8 L6.6 L6.7 L6.8 L6.9 L7.6 L7.7 L7.8 L7.9 L7.10 Q1.3 R12.1 U1.6 | length 126.8
  Top Layer w0.381: 214.912,132.941 IC1.2
  Top Layer w0.635: R12.1 213.815,133.297 214.171,132.941 214.912,132.941 216.281,131.572 216.281,130.937 ; U1.6 214.277,142.212 214.729,141.76 C9.1 ; C9.1@215.825,141.807 215.825,140.664 216.586,139.903 228.143,139.903 228.981,139.065 228.981,132.218 ; v1(216.281,130.302) C6.1 217.871,128.204 218.948,127.127 220.98,127.127 222.123,128.27 C7.1@222.123,130.229 ; C7.1 C8.1 226.938,130.175 228.981,132.218 ; Q1.3 228.981,132.218
  Top Layer w1.016: C12.2 207.931,155.829 213.868,155.829 ; v1(214.63,154.051) 214.63,155.067 213.868,155.829 ; L2.9 216.027,157.988 213.868,155.829
  Top Layer w2.54: Q1.3 236.739,128.662
  Bottom Layer w0.635: C12.2 204.184,153.257 203.2,152.273 203.2,149.225 204.724,147.701 211.377,147.701 212.344,146.734 212.344,145.542 214.605,143.281 214.605,131.978 v1(216.281,130.302)
  Bottom Layer w1.016: D3.1 v1(214.63,154.051) ; L2.9 221.775,155.796 C13.2
-15V_ISO2: C14.2 C15.1 D6.1 L2.11 P7.3 | length 45.9
  Top Layer w1.016: C14.2 207.042,162.306 214.63,162.306 215.392,163.068 L2.11
  Bottom Layer w1.016: P7.3@188.214,161.863 190.819,161.863 191.389,162.433 201.549,162.433 203.486,160.496 C14.2 ; D6.1 214.249,160.909 216.408,163.068 L2.11 221.107,161.544 C15.1
-15V_ISO3: C18.2 C21.2 L2.13 L4.1 P7.2 | length 68.8
  Top Layer w1.016: L4.1 200.406,172.419 C18.2 201.121,176.022 214.884,176.022 219.583,171.323 L2.13
  Bottom Layer w1.016: P7.2 188.307,164.558 189.149,164.558 189.209,164.617 192.159,164.617 192.406,164.37 194.694,164.37 194.941,164.617 196.113,164.617 198.962,167.466 C18.2 ; L2.13 221.775,170.34 C21.2
DC_IN_NEG: C2.1 L1.4 P5.3 | length 20.9
  Bottom Layer w2.54: P5.3 203.802,103.538 C2.1 211.328,101.092 L1.4
DC_IN_POS: C2.2 L1.1 P5.1 | length 20.7
  Bottom Layer w2.54: P5.1 203.694,113.538 C2.2 211.85,116.092 L1.1
DC_OUT_NEG: C3.1 C4.1 C11.2 C13.1 C15.2 C17.2 C21.1 C24.1 C25.1 C26.1 D9.1 IC2.8 L1.3 L2.1 L2.5 R1.4 R14.1 R15.1 U3.3 | length 227.2
  Top Layer w0.635: C17.2 236.379,182.912 237.109,183.642 244.221,183.642 248.031,179.832 C25.1
  Top Layer w1.016: L2.5 237.109,167.513 240.792,163.83 IC2.8 243.078,160.655 251.714,152.019 C11.2
  Bottom Layer w0.635: U3.3 C17.2@236.339,182.031 ; IC2.8 244.282,163.83 244.602,164.15 C26.1 246.7,164.15 248.158,165.608 ; C25.1 252.602,178.562 253.491,177.673 D9.1 ; C24.1 248.158,165.608 ; D9.1 255.905,176.149 258.572,173.482 258.572,167.513 256.995,165.936 R14.1 R15.1 253.439,165.936 252.603,165.1 248.666,165.1 248.158,165.608
  Bottom Layer w1.016: C15.2 232.156,161.544 ; C13.1 231.775,149.225 L2.1 232.156,154.94 232.156,161.544 ; C21.1 231.775,170.561 L2.5 232.156,164.846 232.156,161.544 ; 244.729,91.567 244.729,144.773 C11.2
  Bottom Layer w2.54: L1.3 226.949,100.711 C3.1 234.442,100.711 238.76,96.393 C4.1 241.554,91.186 243.967,91.186 251.203,98.422 R1.4
DC_OUT_POS: C1.2 C3.2 D1.2 L1.2 Q1.2 R2.2 | length 66.3
  Top Layer w0.635: v1(240.157,127.254) 240.284,127.381 243.459,127.381 248.539,122.301 R2.2
  Bottom Layer w1.016: 239.268,133.985 D1.2
  Bottom Layer w2.54: L1.2 227.189,115.711 C3.2 234.329,115.711 238.76,120.142 C1.2 238.76,132.461 237.109,134.112 Q1.2
DIODE_A: L5.9 L5.10 L5.11 L5.12 L6.10 L6.11 L6.12 L6.13 L7.11 L7.12 L7.13 L7.14 L7.15 P3.1
DIODE_K: L5.1 L5.2 L5.3 L5.4 L6.1 L6.2 L6.3 L6.4 L7.1 L7.2 L7.3 L7.4 L7.5 P4.1
EARTH: C1.1 C4.2 L5.0 L5.17 L5.18 L6.0 L6.19 L6.20 L7.0 L7.21 L7.22 P5.2 pad.0 pad.1 pad.2 pad.3 pad.4 Q1.0 | length 51.5
  Bottom Layer w2.54: P5.2@195.66,108.458 pad.0@238.887,108.458 ; C4.2@238.887,104.107 pad.0@238.887,108.458 ; C1.1@238.887,112.395 pad.0@238.887,108.458
FB_FLY: C25.2 IC2.2 U3.4 | length 48
  Top Layer w0.635: C25.2 243.031,177.593 244.221,176.403 254.127,176.403 258.064,172.466 258.064,167.64 256.794,166.37 IC2.2
  Bottom Layer w0.635: U3.4 239.856,184.531 243.031,181.356 C25.2
G_SW_: Q1.1 R11.2 | length 14.8
  Top Layer w0.635: R11.2 230.249,141.85 Q1.1
Iin+_sns: P8.3 R1.2 | length 10.9
  Bottom Layer w0.635: R1.2 257.302,99.568 257.81,99.06 261.112,99.06 262.382,97.79 P8.3
Iin-_sns: P8.2 R1.3 | length 10.6
  Bottom Layer w0.635: R1.3 254.254,100.33 256.54,98.044 258.953,98.044 259.842,97.155 P8.2
Il1+_sns: P8.5 R6.2 | length 11.6
  Bottom Layer w0.635: P8.5 267.462,97.282 267.97,97.79 271.526,97.79 273.939,100.203 R6.2
Il1-_sns: P8.4 R6.3 | length 11.6
  Bottom Layer w0.635: P8.4 264.922,97.663 266.192,98.933 270.129,98.933 270.891,99.695 R6.3
IN_SW_: P1.2 U1.2 | length 22.6
  Top Layer w0.508: v1(206.248,143.51) U1.2@208.325,143.51
  Bottom Layer w0.635: P1.2 189.865,136.906 196.469,143.51 v1(206.248,143.51)
NetC10_1: C10.1 D4.1 R13.1 | length 7.7
  Bottom Layer w0.635: R13.1 241.93,160.378 C10.1
  Bottom Layer w1.016: R13.1 D4.1
NetC10_2: C10.2 C11.1 D1.1 L2.2 R13.2 | length 21.1
  Bottom Layer w0.635: R13.2 241.676,154.328 C10.2
  Bottom Layer w1.016: L2.2 236.578,154.328 R13.2 239.268,153.289 240.538,152.019 241.935,152.019 ; D1.1 239.268,149.352 241.935,152.019 ; C11.1 241.935,152.019
NetC16_1: C16.1 IC2.3 R14.2 R15.2 | length 8.6
  Bottom Layer w0.635: IC2.3 250.772,168.836 R15.2 R14.2 256.413,169.799 256.893,170.279 C16.1
NetC16_2: C16.2 D4.2 IC2.4 IC2.5 L2.4 | length 21.8
  Top Layer w1.016: IC2.5 IC2.4
  Bottom Layer w0.635: IC2.4 C16.2
  Bottom Layer w1.016: L2.4 234.999,163.703 D4.2 242.746,171.45 IC2.5
NetC17_1: C17.1 D8.1 R16.2 | length 9.4
  Bottom Layer w0.635: D8.1 241.537,176.005 R16.2@242.062,176.53
  Bottom Layer w1.016: C17.1 238.379,176.894 D8.1
NetC20_1: C20.1 D7.1 D7.3 L2.12 | length 20.1
  Bottom Layer w0.635: C20.1 209.197,170.787 209.55,170.434 D7.3
  Bottom Layer w1.016: D7.3 207.772,169.672 206.375,168.275 206.375,165.862 207.645,164.592 D7.1 214.63,164.592 215.646,165.608 L2.12
NetC20_2: C20.2 R17.1 | length 2.2
  Bottom Layer w0.635: R17.1@212.697,169.626 C20.2
NetC22_1: C22.1 R20.1 R22.1 R23.2 U4.3 | length 16.6
  Top Layer w0.635: C22.1 208.736,177.918 R23.2 213.605,177.918 214.503,178.816 U4.3 214.512,180.585 216.154,180.585 ; R20.1 216.535,183.524 216.535,180.966 216.154,180.585 ; R22.1 216.154,180.585
NetC22_2: C22.2 C23.1 C27.1 R23.1 | length 7.4
  Top Layer w0.635: C23.1 C27.1 207.673,180.881 C22.2 210.745,179.893 R23.1
NetC23_2: C23.2 C27.2 R21.1 R24.2 R25.2 U4.1 | length 21.8
  Top Layer w0.635: R21.1 R24.2 R25.2 204.089,185.293 205.232,186.436 210.439,186.436 211.173,185.702 C23.2 C27.2 212.344,182.118 213.36,183.134 U4.1
NetC24_2: C24.2 IC2.1 | length 2.9
  Bottom Layer w0.635: C24.2 249.71,162.842 IC2.1
NetC26_2: C26.2 IC2.7 R16.1 R18.2 | length 15.7
  Bottom Layer w0.635: R16.1 R18.2 ; C26.2 244.668,166.05 244.348,166.37 IC2.7 243.586,166.37 245.99,168.774 R18.2@245.99,176.158
NetD2_2: D2.2 L2.8 | length 7.2
  Bottom Layer w1.016: D2.2 216.281,150.876 217.043,151.638 L2.8
NetD5_2: D5.2 L2.10 | length 4.4
  Bottom Layer w1.016: D5.2 214.122,157.607 L2.10
NetD8_2: D8.2 L2.6 | length 4.7
  Bottom Layer w1.016: L2.6 238.616,171.323 D8.2
NetD9_2: D9.2 R18.1 | length 2.2
  Bottom Layer w0.635: R18.1@248.039,176.149 D9.2
NetIC1_1: IC1.1 R9.1 R12.2 U2.3 | length 19.4
  Top Layer w0.381: 215.265,133.985 215.659,133.591 IC1.1
  Top Layer w0.635: U2.3 204.637,134.152 205.105,134.62 211.963,134.62 212.725,135.382 R12.2 213.787,136.197 214.249,135.735 214.884,135.735 214.884,134.366 215.265,133.985
NetP6_1: P6.1 R6.1 | length 9.5
  Bottom Layer w2.54: R6.1 P6.1@286.512,102.743
NetR2_1: R2.1 R3.2 | length 2.1
  Top Layer w0.635: R3.2 R2.1
NetR3_1: R3.1 R4.2 | length 1.9
  Top Layer w0.635: R4.2 R3.1
NetR4_1: R4.1 R5.2 | length 1.9
  Top Layer w0.635: R5.2 R4.1
NetR7_1: R7.1 R9.2 | length 1.8
  Top Layer w0.635: R9.2 R7.1
NetR8_1: R8.1 R10.1 R10.2 | length 5.7
  Top Layer w0.635: R10.1 R10.2 R8.1@210.132,133.35
NetR10_3: R10.3 U2.4 | length 5.8
  Top Layer w0.635: U2.4 206.248,136.652 R10.3
NetR11_1: R11.1 U1.7 | length 5.8
  Top Layer w0.635: U1.7 216.888,143.482 217.306,143.9 R11.1
NetR19_1: R19.1 R21.2 | length 11.6
  Top Layer w0.635: R19.1@189.357,178.181 196.215,178.181 198.882,180.848 R21.2
NetR22_2: R22.2 U3.2 | length 4.1
  Top Layer w0.635: R22.2 221.773,182.635 U3.2
PGND: C5.1 P1.3 U1.3 U1.4 U2.2 | length 30.2
  Top Layer w0.508: C5.1 205.42,142.56 205.768,142.212 U1.3
  Top Layer w0.635: P1.3 190.119,139.446 ; U2.2 191.984,134.152 191.008,135.128 191.008,138.557 190.119,139.446 ; C5.1@204.252,142.073 202.768,140.589 197.117,140.589 195.974,139.446 190.119,139.446 ; U1.4 U1.3
V_LDO: C7.2 C8.2 C9.2 IC1.5 R7.2 R8.2 U1.8 | length 42.9
  Top Layer w0.381: 215.519,137.795 216.281,137.033 216.281,135.003 216.918,134.366 219.71,134.366 219.975,134.101 IC1.5 C7.2@222.093,133.591
  Top Layer w0.635: R8.2 209.931,137.033 210.693,137.795 215.519,137.795 ; U1.8 214.348,144.752 214.856,145.26 C9.2 217.65,145.26 v1(218.186,145.796) ; C7.2@222.093,133.591 C7.2 ; v1(224.155,135.89) 224.127,135.862 R7.2 222.504,135.842 222.504,134.62 222.177,134.293 C7.2 ; C8.2@224.79,133.729 224.736,133.675 C7.2
  Bottom Layer w0.635: v1(218.186,145.796) 220.98,143.002 220.98,136.271 221.361,135.89 v1(224.155,135.89)
VBUS_NEG: C28.1 C29.1 R1.1 R6.4
VBUS_POS: L5.13 L5.14 L5.15 L5.16 L6.15 L6.16 L6.17 L6.18 L7.16 L7.17 L7.18 L7.19 L7.20 P2.1
Vin_sns: P8.1 R5.1 | length 8.8
  Top Layer w0.635: R5.1 P8.1
VSEL: P1.1 U2.1 | length 6.4
  Bottom Layer w0.635: P1.1 191.643,134.366 U2.1
pads on no net: D7.0 IC1.3 IC2.6 L2.3 L2.7 L2.14 L6.5 L6.14 U1.5

## Polygon pours and split planes (outlines as drawn)
-15V_ISO1 on Top Layer "Top Layer-No Net" (solid, remove dead copper, pour order 7): 258.572,177.8 258.572,141.986 235.204,141.986 235.204,126.746 244.983,126.746 244.983,99.568 245.618,98.933 291.592,98.933 291.592,94.361 319.405,94.361 319.405,115.062 294.132,148.463 294.132,148.336 279.4,164.084 279.4,177.8
VBUS_POS on Top Layer "Top Layer-No Net" (solid, remove dead copper, pour order 11): 320.059,182.881 320.059,163.836 359.786,163.836 359.916,163.704 360.045,163.836 360.045,182.881
DIODE_K on Top Layer "Top Layer-No Net" (solid, remove dead copper, pour order 9): 320.273,94.377 320.273,115.078 359.664,115.078 359.664,94.377
DIODE_A on Top Layer "Top Layer-No Net" (solid, remove dead copper, pour order 10): 280.416,182.871 319.151,182.871 319.151,163.821 280.416,163.821
EARTH on Bottom Layer "Top Layer-No Net" (solid, pour order 12): 185.801,188.087 185.801,179.07 194.564,179.07 196.215,180.721 196.215,185.039 197.866,186.69 226.187,186.69 226.441,186.436 226.441,159.512 226.314,159.385 218.948,159.385 215.011,155.448 202.565,155.448 202.565,146.177 210.566,146.177 210.693,146.05 210.693,139.573 197.485,139.573 197.485,125.603 197.866,125.222 243.332,125.222 243.332,91.186 243.459,91.059 243.332,90.932 199.898,90.932 199.898,97.917 199.644,98.171 185.674,98.171 185.801,98.044 185.801,88.392 366.903,88.392 366.903,188.087
VBUS_NEG on Bottom Layer "Top Layer-No Net" (solid, remove dead copper, pour order 8): 279.273,177.8 279.273,163.703 287.782,155.067 293.878,148.463 297.18,144.272 319.151,115.443 319.151,94.361 290.449,94.361 290.449,98.933 243.84,98.933 243.967,99.06 243.967,126.619 235.204,126.619 235.331,126.746 235.331,141.986 258.318,141.986 258.445,141.859 258.572,141.986 258.572,177.8

## Keep-outs
Keep-Out Layer:
  lines w0.635: 185.674,88.519 185.674,174.371 185.674,176.53 185.674,187.579 185.928,187.833 193.548,187.833 196.723,187.833 197.866,186.69 226.187,186.69 226.441,186.436 226.441,159.512 226.568,159.385 218.948,159.385 215.011,155.448 202.565,155.448 202.565,146.177 202.692,146.05 210.693,146.05 210.693,139.573 197.612,139.573 197.485,139.7 197.485,125.349 197.612,125.222 243.332,125.222 243.459,125.349 243.459,88.011 202.819,88.011 199.771,88.011 199.771,94.107 198.12,95.758 197.77,95.758 195.611,97.917 195.611,88.646 194.945,88.646 194.945,88.519 185.674,88.519 ; 254.635,92.837 254.762,92.71 266.573,92.71 273.812,92.71 273.812,98.679 254.635,98.679 254.635,92.837

## Other copper
Bottom Layer:
  pour cut-out: 251.968,179.832 242.824,179.832 242.697,179.705 242.697,177.546 251.841,177.546 252.095,177.292

## Silkscreen, mask and mechanical layers (free items; w line width, h text height)
Mechanical 13:
  lines w0.2: 185.5,126 185.5,145 219.5,145 219.5,142 229.75,142 235.5,142 235.5,126 232.5,126 185.5,126

## Text inside footprints (layer, text, board x,y; h text height)
D7: Bottom Overlay "1" at 204.724,164.592 h1.5 r90; Bottom Overlay "2" at 204.724,167.513 h1.5 r90; Bottom Overlay "3" at 204.724,170.053 h1.5 r90
Q1: Bottom Overlay "1" at 239.268,139.446 h1.5 r270; Bottom Overlay "2" at 239.268,133.35 h1.5 r270; Bottom Overlay "3" at 239.395,128.016 h1.5 r270
U4: Top Overlay "1" at 212.598,183.642 h1.02 r180; Top Overlay "3" at 212.725,180.975 h1.02 r180